# Altium PCB PCB_MAIN.PcbDoc
Units mil, origin at the board's own origin, x right, y up, seen from the top; angles counter-clockwise.
Board outline 6000 x 4000 mil, 2 copper layers (Top Layer, Bottom Layer); 190 components, 105 nets, 560 pads, 0 vias.
Unrouted connection lines stored in the file: 419.
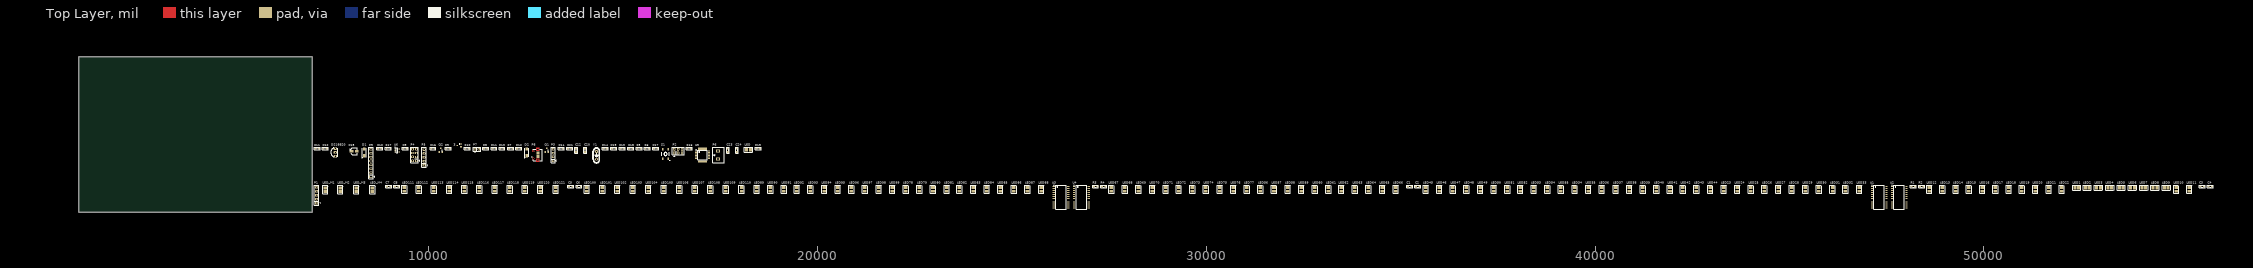
[diagram p0: Top Layer view]
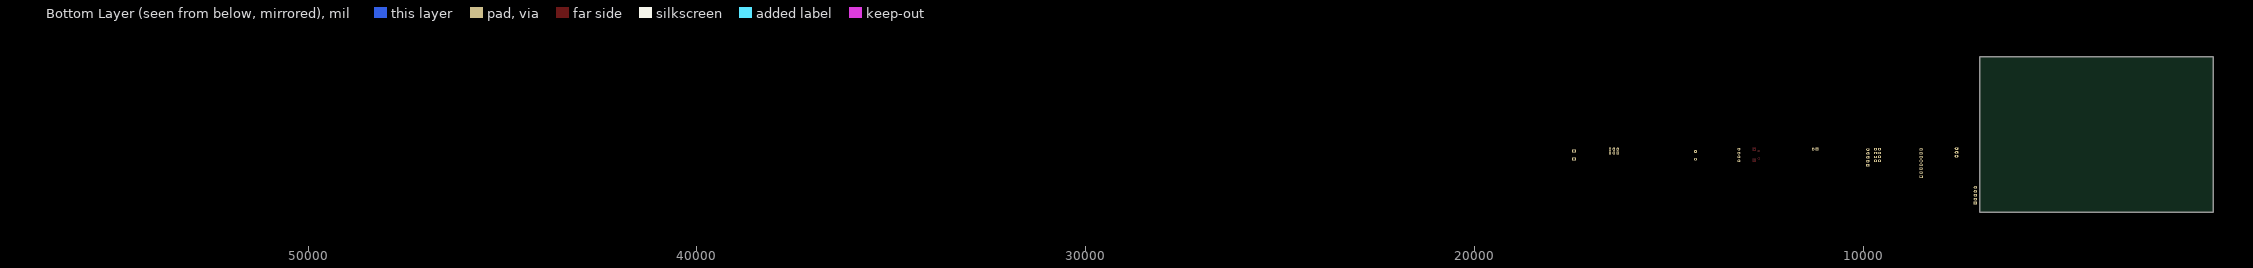
[diagram p1: Bottom Layer view, seen from below]

## Layer stack, top to bottom
Top Solder: solder mask 0.4, Solder Resist, Dk 3.5
Top Layer: signal copper 1.4
Dielectric 1: dielectric 12.6, FR-4, Dk 4.8
Bottom Layer: signal copper 1.4
Bottom Solder: solder mask 0.4, Solder Resist, Dk 3.5

## Board outline
1000,1000 7000,1000 7000,5000 1000,5000

## Design rules (kind name [scope] priority, off if disabled: settings)
Clearance [All] p1: gap=10 ignorepadtopadclearanceinfootprint=FALSE except(0: Arc-Hole Track-Hole SMDPad-Hole THPad-Hole Via-Hole Fill-Hole Poly-Hole Region-Hole Text-Hole)
PolygonConnect [All] p1: connectstyle=Relief reliefconductorwidth=10 reliefentries=4 polygonreliefangle="90 Angle" airgapwidth=10
RoutingVias [All] p1: holewidth=28 width=50 viastyle="Through Hole" minholewidth=28 minwidth=50 maxholewidth=28 maxwidth=50
SolderMaskExpansion [All] p1: expansion=4
Width [All] p1: maxlimit=10 minlimit=10 preferedwidth=10
30 further rules are at their usual default settings.

## Classes and differential pairs
component class Sche_Main: 3 C9 C10 C11 C12 C13 C14 C15 C16 C17 C18 C19 C20 C21 C22 C23 C24 D1 D2 DS18B20 LED P2 P3 P4 P5 P6 P7 P8 P9 Q1 Q2 R5 R6 R7 R8 R9 R10 R11 R12 R13 R14 R15 R16 R17 S1 U5 U6 Y1 Y2

## Components (designator, comment, footprint, x,y, rotation, side; value= is the part's Value field where it differs from the comment)
3 "C1815" SOT23B 10785,2720 r90 top
C1 "Cap Non-Pol SMD" CAP-SM-0805 35185,1665 r0 top value=100pF
C2 "Cap Non-Pol SMD" CAP-SM-0805 35395,1665 r0 top value=100pF
C3 "Cap Non-Pol SMD" CAP-SM-0805 55565,1665 r0 top value=100pF
C4 "Cap Non-Pol SMD" CAP-SM-0805 55775,1665 r0 top value=100pF
C5 "Cap Non-Pol SMD" CAP-SM-0805 13610,1665 r0 top value=100pF
C6 "Cap Non-Pol SMD" CAP-SM-0805 13820,1665 r0 top value=100pF
C7 "Cap Non-Pol SMD" CAP-SM-0805 8925,1665 r0 top value=100pF
C8 "Cap Non-Pol SMD" CAP-SM-0805 9130,1665 r0 top value=100pF
C9 "Cap Non-Pol SMD" CAP-SM-0805 9355,2640 r0 top value=105
C10 "Cap Non-Pol SMD" CAP-SM-0805 8700,2640 r0 top value=223
C11 "Cap Non-Pol SMD" CAP-SM-0805 7085,2640 r0 top value=106
C12 "Cap Non-Pol SMD" CAP-SM-0805 7295,2640 r0 top value=104
C13 "Cap Non-Pol SMD" CAP-SM-0805 14930,2640 r0 top value=105
C14 "Cap Non-Pol SMD" CAP-SM-0805 13365,2640 r0 top value=104
C15 "Cap Pol SMD" "CAP ALU SIZE B" 8080,2570 r0 top value=1000uF
C16 "Cap Non-Pol SMD" CAP-SM-0805 10065,2640 r0 top value=105
C17 "Cap Non-Pol SMD" CAP-SM-0805 15790,2640 r0 top value=20p
C18 "Cap Non-Pol SMD" CAP-SM-0805 15150,2640 r0 top value=20p
C19 "Cap Non-Pol SMD" CAP-SM-0805 14710,2640 r0 top value=20p
C20 "Cap Non-Pol SMD" CAP-SM-0805 14025,2555 r90 top value=20p
C21 "Cap Non-Pol SMD" CAP-SM-0805 13585,2640 r0 top value=104
C22 "Cap Non-Pol SMD" CAP-SM-0805 13795,2555 r90 top value=104
C23 "Cap Non-Pol SMD" CAP-SM-0805 17695,2555 r90 top value=104
C24 "Cap Non-Pol SMD" CAP-SM-0805 17925,2555 r90 top value=104
D1 "D Schottky" SS34 8340,2540 r90 top
D2 "D Schottky" SS34 12520,2540 r90 top
DS18B20 "Header 3" QTO-92 7600,2540 r90 top
LED "KA-3528EC" DIOM3228X21N 18225,2610 r0 top
LED1 "KA-3528EC" DIOM3228X21N 52385,1635 r0 top
LED2 "KA-3528EC" DIOM3228X21N 52655,1635 r0 top
LED3 "KA-3528EC" DIOM3228X21N 52945,1635 r0 top
LED4 "KA-3528EC" DIOM3228X21N 53235,1635 r0 top
LED5 "KA-3528EC" DIOM3228X21N 53530,1635 r0 top
LED6 "KA-3528EC" DIOM3228X21N 53820,1635 r0 top
LED7 "KA-3528EC" DIOM3228X21N 54110,1635 r0 top
LED8 "KA-3528EC" DIOM3228X21N 54400,1635 r0 top
LED9 "KA-3528EC" DIOM3228X21N 54690,1635 r0 top
LED10 "KA-3528EC" DIOM3228X21N 54940,1590 r90 top
LED11 "KA-3528EC" DIOM3228X21N 55280,1590 r90 top
LED12 "KA-3528EC" DIOM3228X21N 48590,1590 r90 top
LED13 "KA-3528EC" DIOM3228X21N 48930,1590 r90 top
LED14 "KA-3528EC" DIOM3228X21N 49270,1590 r90 top
LED15 "KA-3528EC" DIOM3228X21N 49610,1590 r90 top
LED16 "KA-3528EC" DIOM3228X21N 49955,1590 r90 top
LED17 "KA-3528EC" DIOM3228X21N 50295,1590 r90 top
LED18 "KA-3528EC" DIOM3228X21N 50635,1590 r90 top
LED19 "KA-3528EC" DIOM3228X21N 50975,1590 r90 top
LED20 "KA-3528EC" DIOM3228X21N 51315,1590 r90 top
LED21 "KA-3528EC" DIOM3228X21N 51665,1590 r90 top
LED22 "KA-3528EC" DIOM3228X21N 51995,1590 r90 top
LED23 "KA-3528EC" DIOM3228X21N 43305,1590 r90 top
LED24 "KA-3528EC" DIOM3228X21N 43655,1590 r90 top
LED25 "KA-3528EC" DIOM3228X21N 44005,1590 r90 top
LED26 "KA-3528EC" DIOM3228X21N 44355,1590 r90 top
LED27 "KA-3528EC" DIOM3228X21N 44705,1590 r90 top
LED28 "KA-3528EC" DIOM3228X21N 45055,1590 r90 top
LED29 "KA-3528EC" DIOM3228X21N 45405,1590 r90 top
LED30 "KA-3528EC" DIOM3228X21N 45755,1590 r90 top
LED31 "KA-3528EC" DIOM3228X21N 46105,1590 r90 top
LED32 "KA-3528EC" DIOM3228X21N 46435,1590 r90 top
LED33 "KA-3528EC" DIOM3228X21N 46790,1590 r90 top
LED34 "KA-3528EC" DIOM3228X21N 39470,1590 r90 top
LED35 "KA-3528EC" DIOM3228X21N 39820,1590 r90 top
LED36 "KA-3528EC" DIOM3228X21N 40170,1590 r90 top
LED37 "KA-3528EC" DIOM3228X21N 40525,1590 r90 top
LED38 "KA-3528EC" DIOM3228X21N 40875,1590 r90 top
LED39 "KA-3528EC" DIOM3228X21N 41225,1590 r90 top
LED40 "KA-3528EC" DIOM3228X21N 41575,1590 r90 top
LED41 "KA-3528EC" DIOM3228X21N 41925,1590 r90 top
LED42 "KA-3528EC" DIOM3228X21N 42255,1590 r90 top
LED43 "KA-3528EC" DIOM3228X21N 42605,1590 r90 top
LED44 "KA-3528EC" DIOM3228X21N 42955,1590 r90 top
LED45 "KA-3528EC" DIOM3228X21N 35640,1590 r90 top
LED46 "KA-3528EC" DIOM3228X21N 35990,1590 r90 top
LED47 "KA-3528EC" DIOM3228X21N 36340,1590 r90 top
LED48 "KA-3528EC" DIOM3228X21N 36690,1590 r90 top
LED49 "KA-3528EC" DIOM3228X21N 37040,1590 r90 top
LED50 "KA-3528EC" DIOM3228X21N 37390,1590 r90 top
LED51 "KA-3528EC" DIOM3228X21N 37740,1590 r90 top
LED52 "KA-3528EC" DIOM3228X21N 38070,1590 r90 top
LED53 "KA-3528EC" DIOM3228X21N 38420,1590 r90 top
LED54 "KA-3528EC" DIOM3228X21N 38770,1590 r90 top
LED55 "KA-3528EC" DIOM3228X21N 39120,1590 r90 top
LED56 "KA-3528EC" DIOM3228X21N 31390,1590 r90 top
LED57 "KA-3528EC" DIOM3228X21N 31740,1590 r90 top
LED58 "KA-3528EC" DIOM3228X21N 32090,1590 r90 top
LED59 "KA-3528EC" DIOM3228X21N 32440,1590 r90 top
LED60 "KA-3528EC" DIOM3228X21N 32790,1590 r90 top
LED61 "KA-3528EC" DIOM3228X21N 33140,1590 r90 top
LED62 "KA-3528EC" DIOM3228X21N 33470,1590 r90 top
LED63 "KA-3528EC" DIOM3228X21N 33820,1590 r90 top
LED64 "KA-3528EC" DIOM3228X21N 34170,1590 r90 top
LED65 "KA-3528EC" DIOM3228X21N 34520,1590 r90 top
LED66 "KA-3528EC" DIOM3228X21N 34870,1590 r90 top
LED67 "KA-3528EC" DIOM3228X21N 27555,1590 r90 top
LED68 "KA-3528EC" DIOM3228X21N 27905,1590 r90 top
LED69 "KA-3528EC" DIOM3228X21N 28255,1590 r90 top
LED70 "KA-3528EC" DIOM3228X21N 28605,1590 r90 top
LED71 "KA-3528EC" DIOM3228X21N 28955,1590 r90 top
LED72 "KA-3528EC" DIOM3228X21N 29285,1590 r90 top
LED73 "KA-3528EC" DIOM3228X21N 29640,1590 r90 top
LED74 "KA-3528EC" DIOM3228X21N 29990,1590 r90 top
LED75 "KA-3528EC" DIOM3228X21N 30340,1590 r90 top
LED76 "KA-3528EC" DIOM3228X21N 30690,1590 r90 top
LED77 "KA-3528EC" DIOM3228X21N 31040,1590 r90 top
LED78 "KA-3528EC" DIOM3228X21N 22270,1590 r90 top
LED79 "KA-3528EC" DIOM3228X21N 22620,1590 r90 top
LED80 "KA-3528EC" DIOM3228X21N 22970,1590 r90 top
LED81 "KA-3528EC" DIOM3228X21N 23320,1590 r90 top
LED82 "KA-3528EC" DIOM3228X21N 23650,1590 r90 top
LED83 "KA-3528EC" DIOM3228X21N 24000,1590 r90 top
LED84 "KA-3528EC" DIOM3228X21N 24350,1590 r90 top
LED85 "KA-3528EC" DIOM3228X21N 24700,1590 r90 top
LED86 "KA-3528EC" DIOM3228X21N 25050,1590 r90 top
LED87 "KA-3528EC" DIOM3228X21N 25400,1590 r90 top
LED88 "KA-3528EC" DIOM3228X21N 25750,1590 r90 top
LED89 "KA-3528EC" DIOM3228X21N 18435,1590 r90 top
LED90 "KA-3528EC" DIOM3228X21N 18785,1590 r90 top
LED91 "KA-3528EC" DIOM3228X21N 19135,1590 r90 top
LED92 "KA-3528EC" DIOM3228X21N 19465,1590 r90 top
LED93 "KA-3528EC" DIOM3228X21N 19815,1590 r90 top
LED94 "KA-3528EC" DIOM3228X21N 20170,1590 r90 top
LED95 "KA-3528EC" DIOM3228X21N 20520,1590 r90 top
LED96 "KA-3528EC" DIOM3228X21N 20870,1590 r90 top
LED97 "KA-3528EC" DIOM3228X21N 21220,1590 r90 top
LED98 "KA-3528EC" DIOM3228X21N 21570,1590 r90 top
LED99 "KA-3528EC" DIOM3228X21N 21920,1590 r90 top
LED100 "KA-3528EC" DIOM3228X21N 14065,1590 r90 top
LED101 "KA-3528EC" DIOM3228X21N 14465,1590 r90 top
LED102 "KA-3528EC" DIOM3228X21N 14845,1590 r90 top
LED103 "KA-3528EC" DIOM3228X21N 15245,1590 r90 top
LED104 "KA-3528EC" DIOM3228X21N 15645,1590 r90 top
LED105 "KA-3528EC" DIOM3228X21N 16045,1590 r90 top
LED106 "KA-3528EC" DIOM3228X21N 16445,1590 r90 top
LED107 "KA-3528EC" DIOM3228X21N 16845,1590 r90 top
LED108 "KA-3528EC" DIOM3228X21N 17245,1590 r90 top
LED109 "KA-3528EC" DIOM3228X21N 17645,1590 r90 top
LED110 "KA-3528EC" DIOM3228X21N 18045,1590 r90 top
LED111 "KA-3528EC" DIOM3228X21N 9375,1590 r90 top
LED112 "KA-3528EC" DIOM3228X21N 9745,1590 r90 top
LED113 "KA-3528EC" DIOM3228X21N 10135,1590 r90 top
LED114 "KA-3528EC" DIOM3228X21N 10525,1590 r90 top
LED115 "KA-3528EC" DIOM3228X21N 10915,1590 r90 top
LED116 "KA-3528EC" DIOM3228X21N 11305,1590 r90 top
LED117 "KA-3528EC" DIOM3228X21N 11695,1590 r90 top
LED118 "KA-3528EC" DIOM3228X21N 12085,1590 r90 top
LED119 "KA-3528EC" DIOM3228X21N 12475,1590 r90 top
LED120 "KA-3528EC" DIOM3228X21N 12865,1590 r90 top
LED121 "KA-3528EC" DIOM3228X21N 13265,1590 r90 top
LED_M1 "KA-3528EC" DIOM3228X21N 7335,1580 r90 top
LED_M2 "KA-3528EC" DIOM3228X21N 7725,1580 r90 top
LED_M3 "KA-3528EC" DIOM3228X21N 8135,1580 r90 top
LED_M4 "KA-3528EC" DIOM3228X21N 8550,1580 r90 top
P1 "Header 5" JP5 7115,1240 r90 top
P2 "Header 3X2" JP3x2 16415,2575 r0 top
P3 "Header 4" JP4 13200,2425 r90 top
P4 "Header 4X2" JP4x2 9635,2475 r90 top
P5 "Header 5" JP5 9880,2215 r90 top
P6 "Domino 2" "DOMINO 2- 5mm" 17440,2475 r90 top
P7 "Header 2" JP2 11190,2625 r0 top
P8 "ZX62D-B-5P8" HRS_ZX62D-B-5P8 12700,2480 r90 top
P9 "Header 8" JP8 8515,1920 r90 top
Q1 "A1015" SOT23B 13035,2600 r0 top
Q2 "C1815" SOT23B 10310,2600 r0 top
R1 "RESISTOR SMD" RES-SM-0805 48140,1665 r0 top value=10K
R2 "RESISTOR SMD" RES-SM-0805 48350,1665 r0 top value=10K
R3 "RESISTOR SMD" RES-SM-0805 27105,1665 r0 top value=10K
R4 "RESISTOR SMD" RES-SM-0805 27315,1665 r0 top value=10K
R5 "RESISTOR SMD" RES-SM-0805 15370,2640 r0 top value=100K
R6 "RESISTOR SMD" RES-SM-0805 15580,2640 r0 top value=100K
R7 "RESISTOR SMD" RES-SM-0805 12060,2640 r0 top value=27K
R8 "RESISTOR SMD" RES-SM-0805 11425,2640 r0 top value=1K
R9 "RESISTOR SMD" RES-SM-0805 10455,2640 r0 top value=1K
R10 "RESISTOR SMD" RES-SM-0805 10950,2640 r0 top value=100K
R11 "RESISTOR SMD" RES-SM-0805 11635,2640 r0 top value=1K
R12 "RESISTOR SMD" RES-SM-0805 12270,2640 r0 top value=20R
R13 "RESISTOR SMD" RES-SM-0805 11840,2640 r0 top value=20R
R14 "RESISTOR SMD" RES-SM-0805 14490,2640 r0 top value=1M
R15 "RESISTOR SMD" RES-SM-0805 18425,2640 r0 top value=510R
R16 "RESISTOR SMD" RES-SM-0805 16655,2640 r0 top value=10K
R17 "RESISTOR SMD" RES-SM-0805 8920,2640 r0 top value=1K
S1 "TL3342F160QG" SW_TL3342F160QG 16090,2500 r90 top
U1 "MAX7219CWG" SOIC127P1030X265-24N 47305,1385 r0 top
U2 "MAX7219CWG" SOIC127P1030X265-24N 47820,1385 r0 top
U3 "MAX7219CWG" SOIC127P1030X265-24N 26265,1385 r0 top
U4 "MAX7219CWG" SOIC127P1030X265-24N 26785,1385 r0 top
U5 "STM32F103C8Tx" TSQFP50P900X900X160-48N 17045,2470 r0 top
U6 "RT9193" SOT95P279X129-5N 9190,2595 r0 top
Y1 "XTAL" XT2 14315,2465 r90 top

## Footprints (in the part's own frame and the unit in brackets; to place one, negate y for a bottom-side part, rotate by r counter-clockwise, add the part's x,y. Pads: shape width x height; smd on the part's side, far side on the other; paste and mask are expansions set on the pad)
"CAP ALU SIZE B" [mm] "Capacitor, Aluminium Electrolytric, 4.3mm L X 4.3mm W X 5.4mm H, IPC Medium Density"
  rect 2.55x1.6 smd: 1(-1.75,0) 2(1.75,0)
  silkscreen extent -2.8,-2.15 2.15,2.15, body extent -2.75,-2.25 2.75,2.25, height 5.7
CAP-SM-0805 [mil]
  rect 50x55 smd: 1(0,0) 2(90,0)
  silkscreen extent -32,-34 121,33, body extent 6,-25 84,25, height 31
DIOM3228X21N [mm] "Molded Diode, 2-Leads, Body 3.20x2.80mm, IPC Medium Density"
  rect 1.95x2.3 smd: 1(-1.225,0) 2(1.225,0)
  silkscreen extent -2.67,-1.78 2.79,1.65, body extent -1.75,-1.4 1.75,1.4, height 1.9
"DOMINO 2- 5mm" [mm]
  rect 2x2.5 hole 1.2: 1(-2.54,0) 2(2.54,0)
  silkscreen extent -5.08,-4.08 5.08,3.43, body extent -5,-4.07 5,3.43, height 10
HRS_ZX62D-B-5P8 [mm]
  rect 0.4x1.35 smd: 1(-1.3,0) 2(-0.65,0) 3(0,0) 4(0.65,0) 5(1.3,0)
  round 0.6 hole 0.6 unplated: None(-3.512,-2.675) None(3.512,-2.675)
  round 0.4 hole 0.4 unplated: None(-2.425,0.325) None(2.425,0.325)
  rect 0.1x0.1 smd: P1(-2.425,0.85) P2(2.425,0.837) P3(-4.513,-2.712) P6(4.513,-2.688)
  rect 1.8x1.9 smd: P4(-1.15,-2.675) P5(1.15,-2.675)
  Top Layer region: -2.425,0.75 -2.425,0.95 -2.411,0.95 -2.384,0.949 -2.356,0.946 -2.329,0.941 -2.302,0.936 -2.276,0.929 -2.25,0.92 -2.224,0.91 -2.199,0.899 -2.174,0.887 -2.151,0.873 -2.128,0.858 -2.105,0.842 -2.084,0.824 -2.063,0.806 -2.044,0.787 -2.026,0.766 -2.008,0.745 -1.992,0.722 -1.977,0.699 -1.963,0.676 -1.951,0.651 -1.94,0.626 -1.93,0.6 -1.921,0.574 -1.914,0.548 -1.909,0.521 -1.904,0.494 -1.901,0.466 -1.9,0.439 -1.9,0.425 -1.9,0.225 -1.9,0.211 -1.901,0.184 -1.904,0.156 -1.909,0.129 -1.914,0.102 -1.921,0.076 -1.93,0.05 -1.94,0.024 -1.951,-0.001 -1.963,-0.026 -1.977,-0.049 -1.992,-0.072 -2.008,-0.095 -2.026,-0.116 -2.044,-0.137 -2.063,-0.156 -2.084,-0.174 -2.105,-0.192 -2.128,-0.208 -2.151,-0.223 -2.174,-0.237 -2.199,-0.249 -2.224,-0.26 -2.25,-0.27 -2.276,-0.279 -2.302,-0.286 -2.329,-0.291 -2.356,-0.296 -2.384,-0.299 -2.411,-0.3 -2.425,-0.3 -2.425,-0.1 -2.416,-0.1 -2.399,-0.099 -2.383,-0.097 -2.366,-0.095 -2.349,-0.091 -2.333,-0.087 -2.316,-0.081 -2.301,-0.075 -2.285,-0.068 -2.27,-0.061 -2.255,-0.052 -2.241,-0.043 -2.227,-0.033 -2.214,-0.022 -2.201,-0.011 -2.189,0.001 -2.178,0.014 -2.167,0.027 -2.157,0.041 -2.148,0.055 -2.139,0.07 -2.132,0.085 -2.125,0.101 -2.119,0.116 -2.113,0.133 -2.109,0.149 -2.105,0.166 -2.103,0.183 -2.101,0.199 -2.1,0.216 -2.1,0.225 -2.1,0.425 -2.1,0.434 -2.101,0.451 -2.103,0.467 -2.105,0.484 -2.109,0.501 -2.113,0.517 -2.119,0.534 -2.125,0.549 -2.132,0.565 -2.139,0.58 -2.148,0.595 -2.157,0.609 -2.167,0.623 -2.178,0.636 -2.189,0.649 -2.201,0.661 -2.214,0.672 -2.227,0.683 -2.241,0.693 -2.255,0.702 -2.27,0.711 -2.285,0.718 -2.301,0.725 -2.316,0.731 -2.333,0.737 -2.349,0.741 -2.366,0.745 -2.383,0.747 -2.399,0.749 -2.416,0.75 -2.425,0.75
  Top Layer region: -2.425,-0.1 -2.425,-0.3 -2.439,-0.3 -2.466,-0.299 -2.494,-0.296 -2.521,-0.291 -2.548,-0.286 -2.574,-0.279 -2.6,-0.27 -2.626,-0.26 -2.651,-0.249 -2.676,-0.237 -2.699,-0.223 -2.722,-0.208 -2.745,-0.192 -2.766,-0.174 -2.787,-0.156 -2.806,-0.137 -2.824,-0.116 -2.842,-0.095 -2.858,-0.072 -2.873,-0.049 -2.887,-0.026 -2.899,-0.001 -2.91,0.024 -2.92,0.05 -2.929,0.076 -2.936,0.102 -2.941,0.129 -2.946,0.156 -2.949,0.184 -2.95,0.211 -2.95,0.225 -2.95,0.425 -2.95,0.439 -2.949,0.466 -2.946,0.494 -2.941,0.521 -2.936,0.548 -2.929,0.574 -2.92,0.6 -2.91,0.626 -2.899,0.651 -2.887,0.676 -2.873,0.699 -2.858,0.722 -2.842,0.745 -2.824,0.766 -2.806,0.787 -2.787,0.806 -2.766,0.824 -2.745,0.842 -2.722,0.858 -2.699,0.873 -2.676,0.887 -2.651,0.899 -2.626,0.91 -2.6,0.92 -2.574,0.929 -2.548,0.936 -2.521,0.941 -2.494,0.946 -2.466,0.949 -2.439,0.95 -2.425,0.95 -2.425,0.75 -2.434,0.75 -2.451,0.749 -2.467,0.747 -2.484,0.745 -2.501,0.741 -2.517,0.737 -2.534,0.731 -2.549,0.725 -2.565,0.718 -2.58,0.711 -2.595,0.702 -2.609,0.693 -2.623,0.683 -2.636,0.672 -2.649,0.661 -2.661,0.649 -2.672,0.636 -2.683,0.623 -2.693,0.609 -2.702,0.595 -2.711,0.58 -2.718,0.565 -2.725,0.549 -2.731,0.534 -2.737,0.517 -2.741,0.501 -2.745,0.484 -2.747,0.467 -2.749,0.451 -2.75,0.434 -2.75,0.425 -2.75,0.225 -2.75,0.216 -2.749,0.199 -2.747,0.183 -2.745,0.166 -2.741,0.149 -2.737,0.133 -2.731,0.116 -2.725,0.101 -2.718,0.085 -2.711,0.07 -2.702,0.055 -2.693,0.041 -2.683,0.027 -2.672,0.014 -2.661,0.001 -2.649,-0.011 -2.636,-0.022 -2.623,-0.033 -2.609,-0.043 -2.595,-0.052 -2.58,-0.061 -2.565,-0.068 -2.549,-0.075 -2.534,-0.081 -2.517,-0.087 -2.501,-0.091 -2.484,-0.095 -2.467,-0.097 -2.451,-0.099 -2.434,-0.1 -2.425,-0.1
  Top Layer region: 2.425,0.75 2.425,0.95 2.439,0.95 2.466,0.949 2.494,0.946 2.521,0.941 2.548,0.936 2.574,0.929 2.6,0.92 2.626,0.91 2.651,0.899 2.676,0.887 2.699,0.873 2.722,0.858 2.745,0.842 2.766,0.824 2.787,0.806 2.806,0.787 2.824,0.766 2.842,0.745 2.858,0.722 2.873,0.699 2.887,0.676 2.899,0.651 2.91,0.626 2.92,0.6 2.929,0.574 2.936,0.548 2.941,0.521 2.946,0.494 2.949,0.466 2.95,0.439 2.95,0.425 2.95,0.225 2.95,0.211 2.949,0.184 2.946,0.156 2.941,0.129 2.936,0.102 2.929,0.076 2.92,0.05 2.91,0.024 2.899,-0.001 2.887,-0.026 2.873,-0.049 2.858,-0.072 2.842,-0.095 2.824,-0.116 2.806,-0.137 2.787,-0.156 2.766,-0.174 2.745,-0.192 2.722,-0.208 2.699,-0.223 2.676,-0.237 2.651,-0.249 2.626,-0.26 2.6,-0.27 2.574,-0.279 2.548,-0.286 2.521,-0.291 2.494,-0.296 2.466,-0.299 2.439,-0.3 2.425,-0.3 2.425,-0.1 2.434,-0.1 2.451,-0.099 2.467,-0.097 2.484,-0.095 2.501,-0.091 2.517,-0.087 2.534,-0.081 2.549,-0.075 2.565,-0.068 2.58,-0.061 2.595,-0.052 2.609,-0.043 2.623,-0.033 2.636,-0.022 2.649,-0.011 2.661,0.001 2.672,0.014 2.683,0.027 2.693,0.041 2.702,0.055 2.711,0.07 2.718,0.085 2.725,0.101 2.731,0.116 2.737,0.133 2.741,0.149 2.745,0.166 2.747,0.183 2.749,0.199 2.75,0.216 2.75,0.225 2.75,0.425 2.75,0.434 2.749,0.451 2.747,0.467 2.745,0.484 2.741,0.501 2.737,0.517 2.731,0.534 2.725,0.549 2.718,0.565 2.711,0.58 2.702,0.595 2.693,0.609 2.683,0.623 2.672,0.636 2.661,0.649 2.649,0.661 2.636,0.672 2.623,0.683 2.609,0.693 2.595,0.702 2.58,0.711 2.565,0.718 2.549,0.725 2.534,0.731 2.517,0.737 2.501,0.741 2.484,0.745 2.467,0.747 2.451,0.749 2.434,0.75 2.425,0.75
  Top Layer region: 2.425,-0.1 2.425,-0.3 2.411,-0.3 2.384,-0.299 2.356,-0.296 2.329,-0.291 2.302,-0.286 2.276,-0.279 2.25,-0.27 2.224,-0.26 2.199,-0.249 2.174,-0.237 2.151,-0.223 2.128,-0.208 2.105,-0.192 2.084,-0.174 2.063,-0.156 2.044,-0.137 2.026,-0.116 2.008,-0.095 1.992,-0.072 1.977,-0.049 1.963,-0.026 1.951,-0.001 1.94,0.024 1.93,0.05 1.921,0.076 1.914,0.102 1.909,0.129 1.904,0.156 1.901,0.184 1.9,0.211 1.9,0.225 1.9,0.425 1.9,0.439 1.901,0.466 1.904,0.494 1.909,0.521 1.914,0.548 1.921,0.574 1.93,0.6 1.94,0.626 1.951,0.651 1.963,0.676 1.977,0.699 1.992,0.722 2.008,0.745 2.026,0.766 2.044,0.787 2.063,0.806 2.084,0.824 2.105,0.842 2.128,0.858 2.151,0.873 2.174,0.887 2.199,0.899 2.224,0.91 2.25,0.92 2.276,0.929 2.302,0.936 2.329,0.941 2.356,0.946 2.384,0.949 2.411,0.95 2.425,0.95 2.425,0.75 2.416,0.75 2.399,0.749 2.383,0.747 2.366,0.745 2.349,0.741 2.333,0.737 2.316,0.731 2.301,0.725 2.285,0.718 2.27,0.711 2.255,0.702 2.241,0.693 2.227,0.683 2.214,0.672 2.201,0.661 2.189,0.649 2.178,0.636 2.167,0.623 2.157,0.609 2.148,0.595 2.139,0.58 2.132,0.565 2.125,0.549 2.119,0.534 2.113,0.517 2.109,0.501 2.105,0.484 2.103,0.467 2.101,0.451 2.1,0.434 2.1,0.425 2.1,0.225 2.1,0.216 2.101,0.199 2.103,0.183 2.105,0.166 2.109,0.149 2.113,0.133 2.119,0.116 2.125,0.101 2.132,0.085 2.139,0.07 2.148,0.055 2.157,0.041 2.167,0.027 2.178,0.014 2.189,0.001 2.201,-0.011 2.214,-0.022 2.227,-0.033 2.241,-0.043 2.255,-0.052 2.27,-0.061 2.285,-0.068 2.301,-0.075 2.316,-0.081 2.333,-0.087 2.349,-0.091 2.366,-0.095 2.383,-0.097 2.399,-0.099 2.416,-0.1 2.425,-0.1
  Top Layer region: -2.6,-1.725 -4.2,-1.725 -4.213,-1.725 -4.239,-1.726 -4.265,-1.729 -4.291,-1.733 -4.317,-1.739 -4.342,-1.745 -4.367,-1.754 -4.391,-1.763 -4.415,-1.774 -4.439,-1.785 -4.461,-1.799 -4.483,-1.813 -4.504,-1.828 -4.525,-1.845 -4.544,-1.862 -4.563,-1.881 -4.58,-1.9 -4.597,-1.921 -4.612,-1.942 -4.626,-1.964 -4.64,-1.986 -4.651,-2.01 -4.662,-2.034 -4.671,-2.058 -4.68,-2.083 -4.686,-2.108 -4.692,-2.134 -4.696,-2.16 -4.699,-2.186 -4.7,-2.212 -4.7,-2.225 -4.7,-2.675 -3.925,-2.675 -3.925,-2.225 -3.925,-2.217 -3.924,-2.201 -3.923,-2.186 -3.92,-2.17 -3.917,-2.155 -3.913,-2.14 -3.908,-2.125 -3.902,-2.11 -3.896,-2.096 -3.889,-2.082 -3.881,-2.068 -3.872,-2.055 -3.863,-2.042 -3.853,-2.03 -3.843,-2.018 -3.832,-2.007 -3.82,-1.997 -3.808,-1.987 -3.795,-1.978 -3.782,-1.969 -3.768,-1.961 -3.754,-1.954 -3.74,-1.948 -3.725,-1.942 -3.71,-1.937 -3.695,-1.933 -3.68,-1.93 -3.664,-1.927 -3.649,-1.926 -3.633,-1.925 -3.625,-1.925 -3.4,-1.925 -3.392,-1.925 -3.376,-1.926 -3.361,-1.927 -3.345,-1.93 -3.33,-1.933 -3.315,-1.937 -3.3,-1.942 -3.285,-1.948 -3.271,-1.954 -3.257,-1.961 -3.243,-1.969 -3.23,-1.978 -3.217,-1.987 -3.205,-1.997 -3.193,-2.007 -3.182,-2.018 -3.172,-2.03 -3.162,-2.042 -3.153,-2.055 -3.144,-2.068 -3.136,-2.082 -3.129,-2.096 -3.123,-2.11 -3.117,-2.125 -3.112,-2.14 -3.108,-2.155 -3.105,-2.17 -3.102,-2.186 -3.101,-2.201 -3.1,-2.217 -3.1,-2.225 -3.1,-2.675 -2.6,-2.675 -2.6,-1.725
  Top Layer region: 2.6,-3.625 4.2,-3.625 4.213,-3.625 4.239,-3.624 4.265,-3.621 4.291,-3.617 4.317,-3.611 4.342,-3.605 4.367,-3.596 4.391,-3.587 4.415,-3.576 4.439,-3.565 4.461,-3.551 4.483,-3.537 4.504,-3.522 4.525,-3.505 4.544,-3.488 4.563,-3.469 4.58,-3.45 4.597,-3.429 4.612,-3.408 4.626,-3.386 4.64,-3.364 4.651,-3.34 4.662,-3.316 4.671,-3.292 4.68,-3.267 4.686,-3.242 4.692,-3.216 4.696,-3.19 4.699,-3.164 4.7,-3.138 4.7,-3.125 4.7,-2.675 3.925,-2.675 3.925,-3.125 3.925,-3.133 3.924,-3.149 3.923,-3.164 3.92,-3.18 3.917,-3.195 3.913,-3.21 3.908,-3.225 3.902,-3.24 3.896,-3.254 3.889,-3.268 3.881,-3.282 3.872,-3.295 3.863,-3.308 3.853,-3.32 3.843,-3.332 3.832,-3.343 3.82,-3.353 3.808,-3.363 3.795,-3.372 3.782,-3.381 3.768,-3.389 3.754,-3.396 3.74,-3.402 3.725,-3.408 3.71,-3.413 3.695,-3.417 3.68,-3.42 3.664,-3.423 3.649,-3.424 3.633,-3.425 3.625,-3.425 3.4,-3.425 3.392,-3.425 3.376,-3.424 3.361,-3.423 3.345,-3.42 3.33,-3.417 3.315,-3.413 3.3,-3.408 3.285,-3.402 3.271,-3.396 3.257,-3.389 3.243,-3.381 3.23,-3.372 3.217,-3.363 3.205,-3.353 3.193,-3.343 3.182,-3.332 3.172,-3.32 3.162,-3.308 3.153,-3.295 3.144,-3.282 3.136,-3.268 3.129,-3.254 3.123,-3.24 3.117,-3.225 3.112,-3.21 3.108,-3.195 3.105,-3.18 3.102,-3.164 3.101,-3.149 3.1,-3.133 3.1,-3.125 3.1,-2.675 2.6,-2.675 2.6,-3.625
  Top Layer region: -3.1,-2.675 -2.6,-2.675 -2.6,-3.625 -4.2,-3.625 -4.213,-3.625 -4.239,-3.624 -4.265,-3.621 -4.291,-3.617 -4.317,-3.611 -4.342,-3.605 -4.367,-3.596 -4.391,-3.587 -4.415,-3.576 -4.439,-3.565 -4.461,-3.551 -4.483,-3.537 -4.504,-3.522 -4.525,-3.505 -4.544,-3.488 -4.563,-3.469 -4.58,-3.45 -4.597,-3.429 -4.612,-3.408 -4.626,-3.386 -4.64,-3.364 -4.651,-3.34 -4.662,-3.316 -4.671,-3.292 -4.68,-3.267 -4.686,-3.242 -4.692,-3.216 -4.696,-3.19 -4.699,-3.164 -4.7,-3.138 -4.7,-3.125 -4.7,-2.675 -3.925,-2.675 -3.925,-3.15 -3.925,-3.157 -3.924,-3.172 -3.923,-3.186 -3.92,-3.2 -3.917,-3.214 -3.914,-3.228 -3.909,-3.242 -3.904,-3.255 -3.898,-3.268 -3.892,-3.281 -3.885,-3.294 -3.877,-3.306 -3.868,-3.317 -3.859,-3.329 -3.85,-3.339 -3.839,-3.35 -3.829,-3.359 -3.817,-3.368 -3.806,-3.377 -3.794,-3.385 -3.781,-3.392 -3.768,-3.398 -3.755,-3.404 -3.742,-3.409 -3.728,-3.414 -3.714,-3.417 -3.7,-3.42 -3.686,-3.423 -3.672,-3.424 -3.657,-3.425 -3.65,-3.425 -3.4,-3.425 -3.392,-3.425 -3.376,-3.424 -3.361,-3.423 -3.345,-3.42 -3.33,-3.417 -3.315,-3.413 -3.3,-3.408 -3.285,-3.402 -3.271,-3.396 -3.257,-3.389 -3.243,-3.381 -3.23,-3.372 -3.217,-3.363 -3.205,-3.353 -3.193,-3.343 -3.182,-3.332 -3.172,-3.32 -3.162,-3.308 -3.153,-3.295 -3.144,-3.282 -3.136,-3.268 -3.129,-3.254 -3.123,-3.24 -3.117,-3.225 -3.112,-3.21 -3.108,-3.195 -3.105,-3.18 -3.102,-3.164 -3.101,-3.149 -3.1,-3.133 -3.1,-3.125 -3.1,-2.675
  Top Layer region: 3.1,-2.675 2.6,-2.675 2.6,-1.725 4.2,-1.725 4.213,-1.725 4.239,-1.726 4.265,-1.729 4.291,-1.733 4.317,-1.739 4.342,-1.745 4.367,-1.754 4.391,-1.763 4.415,-1.774 4.439,-1.785 4.461,-1.799 4.483,-1.813 4.504,-1.828 4.525,-1.845 4.544,-1.862 4.563,-1.881 4.58,-1.9 4.597,-1.921 4.612,-1.942 4.626,-1.964 4.64,-1.986 4.651,-2.01 4.662,-2.034 4.671,-2.058 4.68,-2.083 4.686,-2.108 4.692,-2.134 4.696,-2.16 4.699,-2.186 4.7,-2.212 4.7,-2.225 4.7,-2.675 3.925,-2.675 3.925,-2.2 3.925,-2.193 3.924,-2.178 3.923,-2.164 3.92,-2.15 3.917,-2.136 3.914,-2.122 3.909,-2.108 3.904,-2.095 3.898,-2.082 3.892,-2.069 3.885,-2.056 3.877,-2.044 3.868,-2.033 3.859,-2.021 3.85,-2.011 3.839,-2 3.829,-1.991 3.817,-1.982 3.806,-1.973 3.794,-1.965 3.781,-1.958 3.768,-1.952 3.755,-1.946 3.742,-1.941 3.728,-1.936 3.714,-1.933 3.7,-1.93 3.686,-1.927 3.672,-1.926 3.657,-1.925 3.65,-1.925 3.4,-1.925 3.392,-1.925 3.376,-1.926 3.361,-1.927 3.345,-1.93 3.33,-1.933 3.315,-1.937 3.3,-1.942 3.285,-1.948 3.271,-1.954 3.257,-1.961 3.243,-1.969 3.23,-1.978 3.217,-1.987 3.205,-1.997 3.193,-2.007 3.182,-2.018 3.172,-2.03 3.162,-2.042 3.153,-2.055 3.144,-2.068 3.136,-2.082 3.129,-2.096 3.123,-2.11 3.117,-2.125 3.112,-2.14 3.108,-2.155 3.105,-2.17 3.102,-2.186 3.101,-2.201 3.1,-2.217 3.1,-2.225 3.1,-2.675
  silkscreen extent -3.75,-5.43 3.75,1.38
JP2 [mil]
  rect 65x75 hole 36: 1(0,0)
  oval 65x75 hole 36: 2(101,0)
  silkscreen extent -50,-81 150,50, body extent -48,-50 148,48, height 323
JP3x2 [mil] "Connector 3x2"
  rect 60x86 hole 36: 1(-100,-50)
  oval 60x86 hole 36: 2(0,-50) 3(99,-50) 4(-100,50) 5(0,50) 6(100,50)
  silkscreen extent -150,-141 153,100, body extent -150,-100 150,100, height 335
JP4 [mil] "Jumper 4"
  oval 65x75 hole 36: 1(-100,0) 2(1,0) 3(99,0) 4(200,0)
  silkscreen extent -150,-81 250,50, body extent -148,-48 248,50, height 323
JP4x2 [mil] "Connector 4x2"
  oval 60x86 hole 36: 1(-150.5,-49.5) 2(-50.5,-49.5) 3(48.5,-49.5) 4(149.5,-51.5) 5(-149.5,51.5) 6(-49.5,51.5) 7(50,50) 8(150.5,51.5)
  silkscreen extent -200,-135 200,101, body extent -197,-100 203,100, height 335
JP5 [mil] "JP5"
  rect 65x90 hole 36: 1(0,0)
  oval 65x90 hole 36: 2(100,0) 3(200,0) 4(300,0) 5(400,0)
  silkscreen extent -57,-101 461,60, body extent -48,-53 448,45, height 323
JP8 [mil] "JP8"
  rect 65x90 hole 42: 1(0,0)
  oval 65x90 hole 42: 2(100,0) 3(200,0) 4(300,0) 5(400,0) 6(500,0) 7(600,0) 8(700,0)
  silkscreen extent -56,-100 752,57, body extent -48,-50 748,48, height 323
QTO-92 [mil] "TO-92"
  oval 66x100 hole 32: 1(-100,0) 2(0,0) 3(100,0)
  silkscreen extent -117,-65 120,118, body extent -109,-66 109,95, height 245
RES-SM-0805 [mil]
  rect 50x55 smd: 1(0,0) 2(90,0)
  silkscreen extent -32,-34 121,33, body extent 6,-25 84,25, height 31
SOIC127P1030X265-24N [mm] "SOIC, 24-Leads, Body 15.40x7.50mm, Pitch 1.27mm, IPC Medium Density"
  rect 1.5x0.59 smd: 1(-4.75,6.985) 2(-4.75,5.715) 3(-4.75,4.445) 4(-4.75,3.175) 5(-4.75,1.905) 6(-4.75,0.635) 7(-4.75,-0.635) 8(-4.75,-1.905) 9(-4.75,-3.175) 10(-4.75,-4.445) 11(-4.75,-5.715) 12(-4.75,-6.985) 13(4.75,-6.985) 14(4.75,-5.715) 15(4.75,-4.445) 16(4.75,-3.175) 17(4.75,-1.905) 18(4.75,-0.635) 19(4.75,0.635) 20(4.75,1.905) 21(4.75,3.175) 22(4.75,4.445) 23(4.75,5.715) 24(4.75,6.985)
  silkscreen extent -4.87,-7.8 3.4,7.95, body extent -5.16,-7.8 5.16,7.8, height 2.65
SOT23B [mm] "SOT 23B"
  rect 0.85x1.2 smd: 1(0.94,-1.245) 2(0,1.25) 3(-0.95,-1.25)
  silkscreen extent 0.77,-0.38 1.02,-0.13, body extent -1.5,-1.3 1.5,1.2, height 1.06
SOT95P279X129-5N [mm] "SOT23, 5-Leads, Body 2.90x2.79mm, Pitch 0.95mm, IPC Medium Density"
  rect 0.95x0.65 smd: 1(-1.375,0.95) 2(-1.375,0) 3(-1.375,-0.95) 4(1.375,-0.95) 5(1.375,0.95)
  silkscreen extent -1.5,-1.55 0.5,1.95, body extent -1.5,-1.55 1.5,1.55, height 1.3
SS34 [mm] "DO-214-AC/SMA Molded Diode, Body 5.3x2.6mm, IPC Medium Density"
  rect 2.1x1.55 smd: 1(-2.2,0) 2(2.2,0)
  silkscreen extent -3.52,-1.4 2.75,1.45, body extent -2.75,-1.4 2.75,1.4, height 2.3
SW_TL3342F160QG [mm]
  rect 1.7x1 smd: 1(-3.15,-1.9) 2(3.15,-1.9) 3(-3.15,1.9) 4(3.15,1.9)
  silkscreen extent -4.38,-2.88 1.1,2.6
TSQFP50P900X900X160-48N [mm] "TSQFP, 48-Leads, Body 7.00x7.00mm, Pitch 0.50mm, IPC Medium Density"
  rect 1.45x0.3 smd: 1(-4.225,2.75) 2(-4.225,2.25) 3(-4.225,1.75) 4(-4.225,1.25) 5(-4.225,0.75) 6(-4.225,0.25) 7(-4.225,-0.25) 8(-4.225,-0.75) 9(-4.225,-1.25) 10(-4.225,-1.75) 11(-4.225,-2.25) 12(-4.225,-2.75) 25(4.225,-2.75) 26(4.225,-2.25) 27(4.225,-1.75) 28(4.225,-1.25) 29(4.225,-0.75) 30(4.225,-0.25) 31(4.225,0.25) 32(4.225,0.75) 33(4.225,1.25) 34(4.225,1.75) 35(4.225,2.25) 36(4.225,2.75)
  rect 0.3x1.45 smd: 13(-2.75,-4.225) 14(-2.25,-4.225) 15(-1.75,-4.225) 16(-1.25,-4.225) 17(-0.75,-4.225) 18(-0.25,-4.225) 19(0.25,-4.225) 20(0.75,-4.225) 21(1.25,-4.225) 22(1.75,-4.225) 23(2.25,-4.225) 24(2.75,-4.225) 37(2.75,4.225) 38(2.25,4.225) 39(1.75,4.225) 40(1.25,4.225) 41(0.75,4.225) 42(0.25,4.225) 43(-0.25,4.225) 44(-0.75,4.225) 45(-1.25,4.225) 46(-1.75,4.225) 47(-2.25,4.225) 48(-2.75,4.225)
  silkscreen extent -4.35,-3.1 3.1,3.57, body extent -4.5,-4.5 4.5,4.5, height 1.6
XT2 [mil] "Footpin for Crystal 2 pin"
  round 75 hole 34: 1(-100,0) 2(100,0)
  silkscreen extent -198,-90 195,90, body extent -233,-93 213,90, height 138

## Part data
3 Q2: "NPN Bipolar Transistor"
C1 C2 C3 C4 C5 C6 C7 C8 C9 C10 C11 C12 C13 C14 C16 C17 C18 C19 C20 C21 C22 C23 C24: "Capacitor"
C15: "Polarized Capacitor (Radial)"
D1 D2: "Schottky Diode", Code_JEDEC=DO-214-AA, LatestRevisionDate=17-Jul-2002, LatestRevisionNote="Re-released for DXP Platform.", PackageDescription="DO-214-AA/SMB; 2 C-Bend Leads; Body 5.3 x 3.6 mm, inc. leads (LxW)", PackageReference=SMB, Published=8-Jun-2000, Publisher="Altium Limited"
DS18B20: "Header, 3-Pin", LatestRevisionDate=17-Jul-2002, LatestRevisionNote="Re-released for DXP Platform.", Publisher="Altium Limited"
LED LED1 LED2 LED3 LED4 LED5 LED6 LED7 LED8 LED9 LED10 LED11 LED12 LED13 LED14 LED15 LED16 LED17 LED18 LED19 LED20 LED21 LED22 LED23 LED24 LED25 LED26 LED27 LED28 LED29 LED30 LED31 LED32 LED33 LED34 LED35 LED36 LED37 LED38 LED39 LED40 LED41 LED42 LED43 LED44 LED45 LED46 LED47 LED48 LED49 LED50 LED51 LED52 LED53 LED54 LED55 LED56 LED57 LED58 LED59 LED60 LED61 LED62 LED63 LED64 LED65 LED66 LED67 LED68 LED69 LED70 LED71 LED72 LED73 LED74 LED75 LED76 LED77 LED78 LED79 LED80 LED81 LED82 LED83 LED84 LED85 LED86 LED87 LED88 LED89 LED90 LED91 LED92 LED93 LED94 LED95 LED96 LED97 LED98 LED99 LED100 LED101 LED102 LED103 LED104 LED105 LED106 LED107 LED108 LED109 LED110 LED111 LED112 LED113 LED114 LED115 LED116 LED117 LED118 LED119 LED120 LED121 LED_M1 LED_M2 LED_M3 LED_M4: library part LED_3528, "KINGBRIGHT         KA-3528EC             LED, Red, SMD, 2.4mm, 20 mA, 2 V, 627 nm", Color=Red, Manufacturer=Kingbright, Package=2SMD, Supplier Part Number 1=8530211, Category=LEDs, ComponentLink1Description=https://datasheet.ciiva.com/5785/1500240-5785780.pdf, ComponentLink1URL=https://datasheet.ciiva.com/5785/1500240-5785780.pdf, ComponentLink2Description=https://datasheet.ciiva.com/14176/bd254568-254571-14176482.pdf, ComponentLink2URL=https://datasheet.ciiva.com/14176/bd254568-254571-14176482.pdf, ComponentLink3Description=https://datasheet.ciiva.com/8060/1500240-8060332.pdf, ComponentLink3URL=https://datasheet.ciiva.com/8060/1500240-8060332.pdf, ComponentLink4Description=https://datasheet.ciiva.com/8060/1500240-8060331.pdf, ComponentLink4URL=https://datasheet.ciiva.com/8060/1500240-8060331.pdf, ComponentLink5Description=https://datasheet.ciiva.com/20166/72-8261-20166551.pdf, ComponentLink5URL=https://datasheet.ciiva.com/20166/72-8261-20166551.pdf, Intensity="40(Max) mcd", Lens Appearance="Colorless Non Diffused", Lens Shape Type=Circular, Manufacturer Part Number=KA-3528EC, Mounting="Surface Mount", Mounting Orientation="Top Mount", Number of LEDs=1, Peak Wavelength="625 nm", Pin Count=2, Pricing 1="5=0.372, 25=0.282, 100=0.232, 250=0.175, 500=0.15, 1000=0.134 (EUR)", Rad Hard=No, Stock 1=2196, Supplier 1=Farnell, Type=Uni-Color, Viewing Angle="120 °"
P1 P5: "Header, 5-Pin", LatestRevisionDate=17-Jul-2002, LatestRevisionNote="Re-released for DXP Platform.", Publisher="Altium Limited"
P2: "Header, 3-Pin, Dual row", LatestRevisionDate=17-Jul-2002, LatestRevisionNote="Re-released for DXP Platform.", Publisher="Altium Limited"
P3: "Header, 4-Pin", LatestRevisionDate=17-Jul-2002, LatestRevisionNote="Re-released for DXP Platform.", Publisher="Altium Limited"
P4: "Header, 4-Pin, Dual row", LatestRevisionDate=17-Jul-2002, LatestRevisionNote="Re-released for DXP Platform.", Publisher="Altium Limited"
P6: "Domino, 2-Pin", LatestRevisionDate=17-Jul-2002, LatestRevisionNote="Re-released for DXP Platform.", Publisher="Altium Limited"
P7: "Header, 2-Pin", LatestRevisionDate=17-Jul-2002, LatestRevisionNote="Re-released for DXP Platform.", Publisher="Altium Limited"
P8: "SMD+DIP Micro USB; MICRO-B-SMD", Package=None, Availability=Unavailable, MF=Hirose, MP=ZX62D-B-5P8, Price=None, SnapEDA_Link=https://www.snapeda.com/parts/ZX62D-B-5P8/Hirose%20Electric%20Co%20Ltd/view-part/?ref=snap
P9: "Header, 8-Pin", LatestRevisionDate=17-Jul-2002, LatestRevisionNote="Re-released for DXP Platform.", Publisher="Altium Limited"
Q1: "PNP Bipolar Transistor"
R1 R2 R3 R4 R5 R6 R7 R8 R9 R10 R11 R12 R13 R14 R15 R16 R17: "Resistor"
S1: "TL3342 Series SPST 1.6 N Round Button Gull Wing Surface Mount Tactile Switch", Package=None, Availability=Good, MF=E-Switch, MP=TL3342F160QG, Price="0.41 USD", SnapEDA_Link=https://www.snapeda.com/parts/TL3342F160QG/E-Switch/view-part/?ref=snap
U1 U2 U3 U4: "IC DRIVER LED DISP 8DGT 24-SOIC", High Level Output Current="- 2 mA", Low Level Output Current="5 mA", Manufacturer=Maxim, Maximum Operating Temperature="+ 70 C", Minimum Operating Temperature="0 C", Operating Supply Voltage="4 V to 5.5 V", Package / Case=SOIC-Wide-24, Pd - Power Dissipation="941 mW", Supplier Part Number 1=MAX7219CWG-ND, Supply Current - Max="330 mA", &lt;PCN&gt;="http://www.mouser.com/PCN/Maxim IC_M000753.pdf", Brand="Maxim Integrated", ComponentLink1Description=https://datasheet.ciiva.com/26876/max7219cwg-26876054.pdf, ComponentLink1URL=https://datasheet.ciiva.com/26876/max7219cwg-26876054.pdf, ComponentLink2Description=https://datasheet.ciiva.com/3166/max7219-max7221-3166235.pdf, ComponentLink2URL=https://datasheet.ciiva.com/3166/max7219-max7221-3166235.pdf, ComponentLink3Description=https://datasheet.ciiva.com/1941/max7219-max7221-1941392.pdf, ComponentLink3URL=https://datasheet.ciiva.com/1941/max7219-max7221-1941392.pdf, ComponentLink4Description=https://datasheet.ciiva.com/17405/max7219-max7221-17405253.pdf, ComponentLink4URL=https://datasheet.ciiva.com/17405/max7219-max7221-17405253.pdf, Factory Pack Quantity=30, Height="2.35 mm", Length="15.6 mm", Manufacturer Part Number=MAX7219CWG, Mounting Style=SMD/SMT, Number of Digits=8, Number of Segments=64, Packaging=Tube, Part # Aliases=MAX7219, Product="LED Display Drivers", Product Category="LED Display Drivers", Series=MAX7219, Stock 1=0, Supplier 1=Digi-Key, Unit Weight="0.025909 oz", Width="7.6 mm"
U5: "MCU 32-bit STM32F ARM Cortex M3 RISC 64KB Flash 2.5V/3.3V 48-Pin LQFP Tray", Manufacturer=STMicroelectronics, Manufacturer Part Number=STM32F103C8T6, Maximum Frequency=72MHz, Maximum Operating Temperature="+85 °C", Minimum Operating Temperature="-40 °C", Package Type=LQFP, Supplier Part Number 1=497-6063-ND, Typical Operating Supply Voltage="2 ? 3.6 V", ADC Channels=10, ADC Resolution=12bit, ADCs="2(10 x 12 bit)", ComponentLink1Description=https://datasheet.ciiva.com/16210/cd00161566-16210248.pdf, ComponentLink1URL=https://datasheet.ciiva.com/16210/cd00161566-16210248.pdf, ComponentLink2Description=https://datasheet.ciiva.com/14100/pustm-arm-microcont-stm32f103-en-14100508.pdf, ComponentLink2URL=https://datasheet.ciiva.com/14100/pustm-arm-microcont-stm32f103-en-14100508.pdf, ComponentLink3Description=https://datasheet.ciiva.com/15122/getdatasheetpartid-69880-15122076.pdf, ComponentLink3URL=https://datasheet.ciiva.com/15122/getdatasheetpartid-69880-15122076.pdf, ComponentLink4Description=https://datasheet.ciiva.com/8054/1730126-8054942.pdf, ComponentLink4URL=https://datasheet.ciiva.com/8054/1730126-8054942.pdf, ComponentLink5Description=https://datasheet.ciiva.com/48687/001075658-da-01-en-mcu-64kb-mem-stm32f103c8t6-lqfp-48-stm-48687589.pdf, ComponentLink5URL=https://datasheet.ciiva.com/48687/001075658-da-01-en-mcu-64kb-mem-stm32f103c8t6-lqfp-48-stm-48687589.pdf, ComponentLink6Description=https://datasheet.ciiva.com/26816/stm32f103c8t6-26816902.pdf, ComponentLink6URL=https://datasheet.ciiva.com/26816/stm32f103c8t6-26816902.pdf, Data Bus Width=32bit, Device Core="ARM Cortex M3", Dimensions="7.2 x 7.2 x 1.45mm", Family Name=STM32F, Height=1.45mm, Instruction Set Architecture=RISC, Length=7.2mm, Mounting Type="Surface Mount", Number of ADC Units=2, Number of CAN Channels=1, Number of I2C Channels=2, Number of PWM Units=1, Number of SPI Channels=2, Number of Timers=3, Number of USART Channels=3, Pin Count=48, Pricing 1="1=6.06, 10=5.438, 100=4.4558, 500=3.7931, 1000=3.199 (USD)", Program Memory Size="64 kB", Program Memory Type=Flash, Pulse Width Modulation="1(16 bit) (Motor Control)", PWM Resolution=16bit, RAM Size="20 kB", Stock 1=2771, Supplier 1=Digi-Key, Timer Resolution=16bit, Timers="3 x 16 bit", USB Channels="1 x Device", Width=7.2mm
U6: "RICHTEK         RT9193-15GB            IC, LDO, FIXED, 1.5V, 0.3A, SOT-23-5", Input Voltage Max=5.5V, Input Voltage Min=2.5V, LDO Regulator Case Style=SOT-23, Manufacturer=Richtek, Manufacturer Part Number=RT9193-15GB, Operating Temperature Max=85°C, Operating Temperature Min=-40°C, Output Current=300mA, Output Voltage Nom.=1.5V, Supplier Part Number 1=42AC0083, ComponentLink1Description=http://www.farnell.com/datasheets/1720535.pdf, ComponentLink1URL=http://www.farnell.com/datasheets/1720535.pdf, ComponentLink2Description=http://www.richtek.com/assets/product_file/RT9193/DS9193-16.pdf, ComponentLink2URL=http://www.richtek.com/assets/product_file/RT9193/DS9193-16.pdf, No. of Pins=5Pins, Packaging=Each, Stock 1=2999, Supplier 1=Newark, SVHC="No SVHC (17-Dec-2015)"
Y1: "Crystal Oscillator", LatestRevisionDate=17-Jul-2002, LatestRevisionNote="Re-released for DXP Platform.", PackageDescription="Crystal, Thru-Hole; 2 Leads; Body 3.1 x 8.2 mm (Dia.xH)", PackageReference=R38, Published=8-Jun-2000, Publisher="Altium Limited"

## Nets (pads, with @x,y where several pads share a name; then routed paths per layer and width w, separated by ;. In a path a pad name is that pad's centre, name@x,y a point inside that pad or via, vN(x,y) a via of type N, cw(c..) or ccw(c..) an arc to the next point about the centre after c; other vN are vias at no path point)
5V: C9.2 P5.2 P8.1 R10.1 U6.1 U6.3
ADC: DS18B20.2 R17.2 U5.19
BOOT0: R5.1 U5.44
BOOT1: R6.2 U5.20
BUZZER: P6.1 U5.2
CLK: P1.5 P5.5 U1.13 U2.13 U3.13 U4.13 U5.15
CONTROL: R9.1 U5.11
DIN_U1: P1.3 P5.3 U1.1 U5.16
DOUT_U1: U1.24 U2.1
DOUT_U2: U2.24 U3.1
DOUT_U3: U3.24 U4.1
GND: 3.1 C1.1 C2.1 C3.1 C4.1 C5.1 C6.1 C7.1 C8.1 C9.1 C10.1 C11.1 C12.1 C14.1 C15.2 C16.1 C17.1 C18.1 C19.1 C20.1 C21.1 C22.1 C23.1 C24.1 DS18B20.1 P1.1 P2.3 P2.6 P3.4 P5.1 P6.2 P7.2 P8.4 P8.5 Q2.1 R15.2 U1.4 U1.9 U2.4 U2.9 U3.4 U3.9 U4.4 U4.9 U5.8 U5.23 U5.35 U5.47 U6.2
LED0_U1: LED1.2 LED12.2 LED23.2 LED34.2 LED45.2 LED56.2 LED67.2 LED78.2 U1.2
LED0_U2: LED9.2 LED20.2 LED31.2 LED42.2 LED53.2 LED64.2 LED75.2 LED86.2 U2.2
LED0_U3: LED89.2 LED100.2 LED111.2 U3.2
LED0_U4: LED97.2 LED108.2 LED119.2 LED_M1.2 U4.2
LED1_U1: LED2.2 LED13.2 LED24.2 LED35.2 LED46.2 LED57.2 LED68.2 LED79.2 U1.11
LED1_U2: LED10.2 LED21.2 LED32.2 LED43.2 LED54.2 LED65.2 LED76.2 LED87.2 U2.11
LED1_U3: LED90.2 LED101.2 LED112.2 U3.11
LED1_U4: LED98.2 LED109.2 LED120.2 LED_M2.2 U4.11
LED2_U1: LED3.2 LED14.2 LED25.2 LED36.2 LED47.2 LED58.2 LED69.2 LED80.2 U1.6
LED2_U2: LED11.2 LED22.2 LED33.2 LED44.2 LED55.2 LED66.2 LED77.2 LED88.2 U2.6
LED2_U3: LED91.2 LED102.2 LED113.2 U3.6
LED2_U4: LED99.2 LED110.2 LED121.2 LED_M3.2 U4.6
LED3_U1: LED4.2 LED15.2 LED26.2 LED37.2 LED48.2 LED59.2 LED70.2 LED81.2 U1.7
LED3_U3: LED92.2 LED103.2 LED114.2 U3.7
LED3_U4: LED_M4.2 U4.7
LED4_U1: LED5.2 LED16.2 LED27.2 LED38.2 LED49.2 LED60.2 LED71.2 LED82.2 U1.3
LED4_U3: LED93.2 LED104.2 LED115.2 U3.3
LED5_U1: LED6.2 LED17.2 LED28.2 LED39.2 LED50.2 LED61.2 LED72.2 LED83.2 U1.10
LED5_U3: LED94.2 LED105.2 LED116.2 U3.10
LED6_U1: LED7.2 LED18.2 LED29.2 LED40.2 LED51.2 LED62.2 LED73.2 LED84.2 U1.5
LED6_U3: LED95.2 LED106.2 LED117.2 U3.5
LED7_U1: LED8.2 LED19.2 LED30.2 LED41.2 LED52.2 LED63.2 LED74.2 LED85.2 U1.8
LED7_U3: LED96.2 LED107.2 LED118.2 U3.8
LEDA_U1: LED1.1 LED2.1 LED3.1 LED4.1 LED5.1 LED6.1 LED7.1 LED8.1 U1.14
LEDA_U2: LED9.1 LED10.1 LED11.1 U2.14
LEDA_U3: LED89.1 LED90.1 LED91.1 LED92.1 LED93.1 LED94.1 LED95.1 LED96.1 U3.14
LEDA_U4: LED97.1 LED98.1 LED99.1 U4.14
LEDB_U1: LED12.1 LED13.1 LED14.1 LED15.1 LED16.1 LED17.1 LED18.1 LED19.1 U1.16
LEDB_U2: LED20.1 LED21.1 LED22.1 U2.16
LEDB_U3: LED100.1 LED101.1 LED102.1 LED103.1 LED104.1 LED105.1 LED106.1 LED107.1 U3.16
LEDB_U4: LED108.1 LED109.1 LED110.1 U4.16
LEDC_U1: LED23.1 LED24.1 LED25.1 LED26.1 LED27.1 LED28.1 LED29.1 LED30.1 U1.20
LEDC_U2: LED31.1 LED32.1 LED33.1 U2.20
LEDC_U3: LED111.1 LED112.1 LED113.1 LED114.1 LED115.1 LED116.1 LED117.1 LED118.1 U3.20
LEDC_U4: LED119.1 LED120.1 LED121.1 U4.20
LEDD_U1: LED34.1 LED35.1 LED36.1 LED37.1 LED38.1 LED39.1 LED40.1 LED41.1 U1.23
LEDD_U2: LED42.1 LED43.1 LED44.1 U2.23
LEDD_U4: LED_M1.1 LED_M2.1 LED_M3.1 LED_M4.1 U4.23
LEDDP_U1: LED78.1 LED79.1 LED80.1 LED81.1 LED82.1 LED83.1 LED84.1 LED85.1 U1.22
LEDDP_U2: LED86.1 LED87.1 LED88.1 U2.22
LEDE_U1: LED45.1 LED46.1 LED47.1 LED48.1 LED49.1 LED50.1 LED51.1 LED52.1 U1.21
LEDE_U2: LED53.1 LED54.1 LED55.1 U2.21
LEDF_U1: LED56.1 LED57.1 LED58.1 LED59.1 LED60.1 LED61.1 LED62.1 LED63.1 U1.15
LEDF_U2: LED64.1 LED65.1 LED66.1 U2.15
LEDG_U1: LED67.1 LED68.1 LED69.1 LED70.1 LED71.1 LED72.1 LED73.1 LED74.1 U1.17
LEDG_U2: LED75.1 LED76.1 LED77.1 U2.17
LOAD: P1.4 P5.4 U1.12 U2.12 U3.12 U4.12 U5.17
Net3_2: 3.2 R11.1
Net3_3: 3.3 R10.2
NetC10_2: C10.2 U6.4
NetC13_1: C13.1 S1.1 S1.2
NetD1_1: D1.1 U6.5
NetD2_1: D2.1 Q1.2
NetLED_2: LED.2 R15.1
NetP2_2: P2.2 R5.2
NetP2_5: P2.5 R6.1
NetP7_1: P7.1 Q1.1 R7.1
NetP8_2: P8.2 R12.2
NetP8_3: P8.3 R13.2
NetQ1_3: Q1.3 R7.2 R8.2
NetQ2_2: Q2.2 R8.1
NetQ2_3: Q2.3 R9.2
NetR1_1: R1.1 U1.18
NetR2_1: R2.1 U2.18
NetR3_1: R3.1 U3.18
NetR4_1: R4.1 U4.18
NRST: C13.2 R16.1 S1.3 S1.4 U5.7
OSCIN: C19.2 R14.2 U5.5 Y1.1
OSCOUT: C20.2 R14.1 U5.6 Y1.2
P1: P4.1 U5.28
P2: P4.2 U5.27
P3: P4.3 U5.26
P4: P4.4 U5.25
PA12: R13.1 U5.33
PA15: P9.8 U5.38
PB3: P9.7 U5.39
PB4: P9.6 U5.40
PB5: P9.5 U5.41
PB6: P9.4 U5.42
PB7: P9.3 U5.43
PB8: P9.2 U5.45
PB9: P9.1 U5.46
PC14: C17.2 U5.3
PC15: C18.2 U5.4
PLD: C16.2 U5.12
SWCLK: P3.2 U5.37
SWIO: P3.3 U5.34
T1: P4.5 R12.1 U5.32
T2: P4.6 U5.31
T3: P4.7 U5.30
T4: P4.8 U5.29
VCC: C1.2 C2.2 C3.2 C4.2 C5.2 C6.2 C7.2 C8.2 P1.2 R1.2 R2.2 R3.2 R4.2 U1.19 U2.19 U3.19 U4.19
VCC3V3: C11.2 C12.2 C14.2 C15.1 C21.2 C22.2 C23.2 C24.2 D1.2 D2.2 DS18B20.3 LED.1 P2.1 P2.4 P3.1 R11.2 R16.2 R17.1 U5.9 U5.24 U5.36 U5.48
pads on no net: P8.None P8.P1 P8.P2 P8.P3 P8.P4 P8.P5 P8.P6 U2.3 U2.5 U2.7 U2.8 U2.10 U3.15 U3.17 U3.21 U3.22 U3.23 U4.3 U4.5 U4.8 U4.10 U4.15 U4.17 U4.21 U4.22 U4.24 U5.1 U5.10 U5.13 U5.14 U5.18 U5.21 U5.22